# Altium PCB SLAYER_Altium.PcbDoc
Units mil, origin at the board's own origin, x right, y up, seen from the top; angles counter-clockwise.
Board outline not stored, 2 copper layers (Top Layer, Bottom Layer); 60 components, 37 nets, 254 pads, 109 vias.
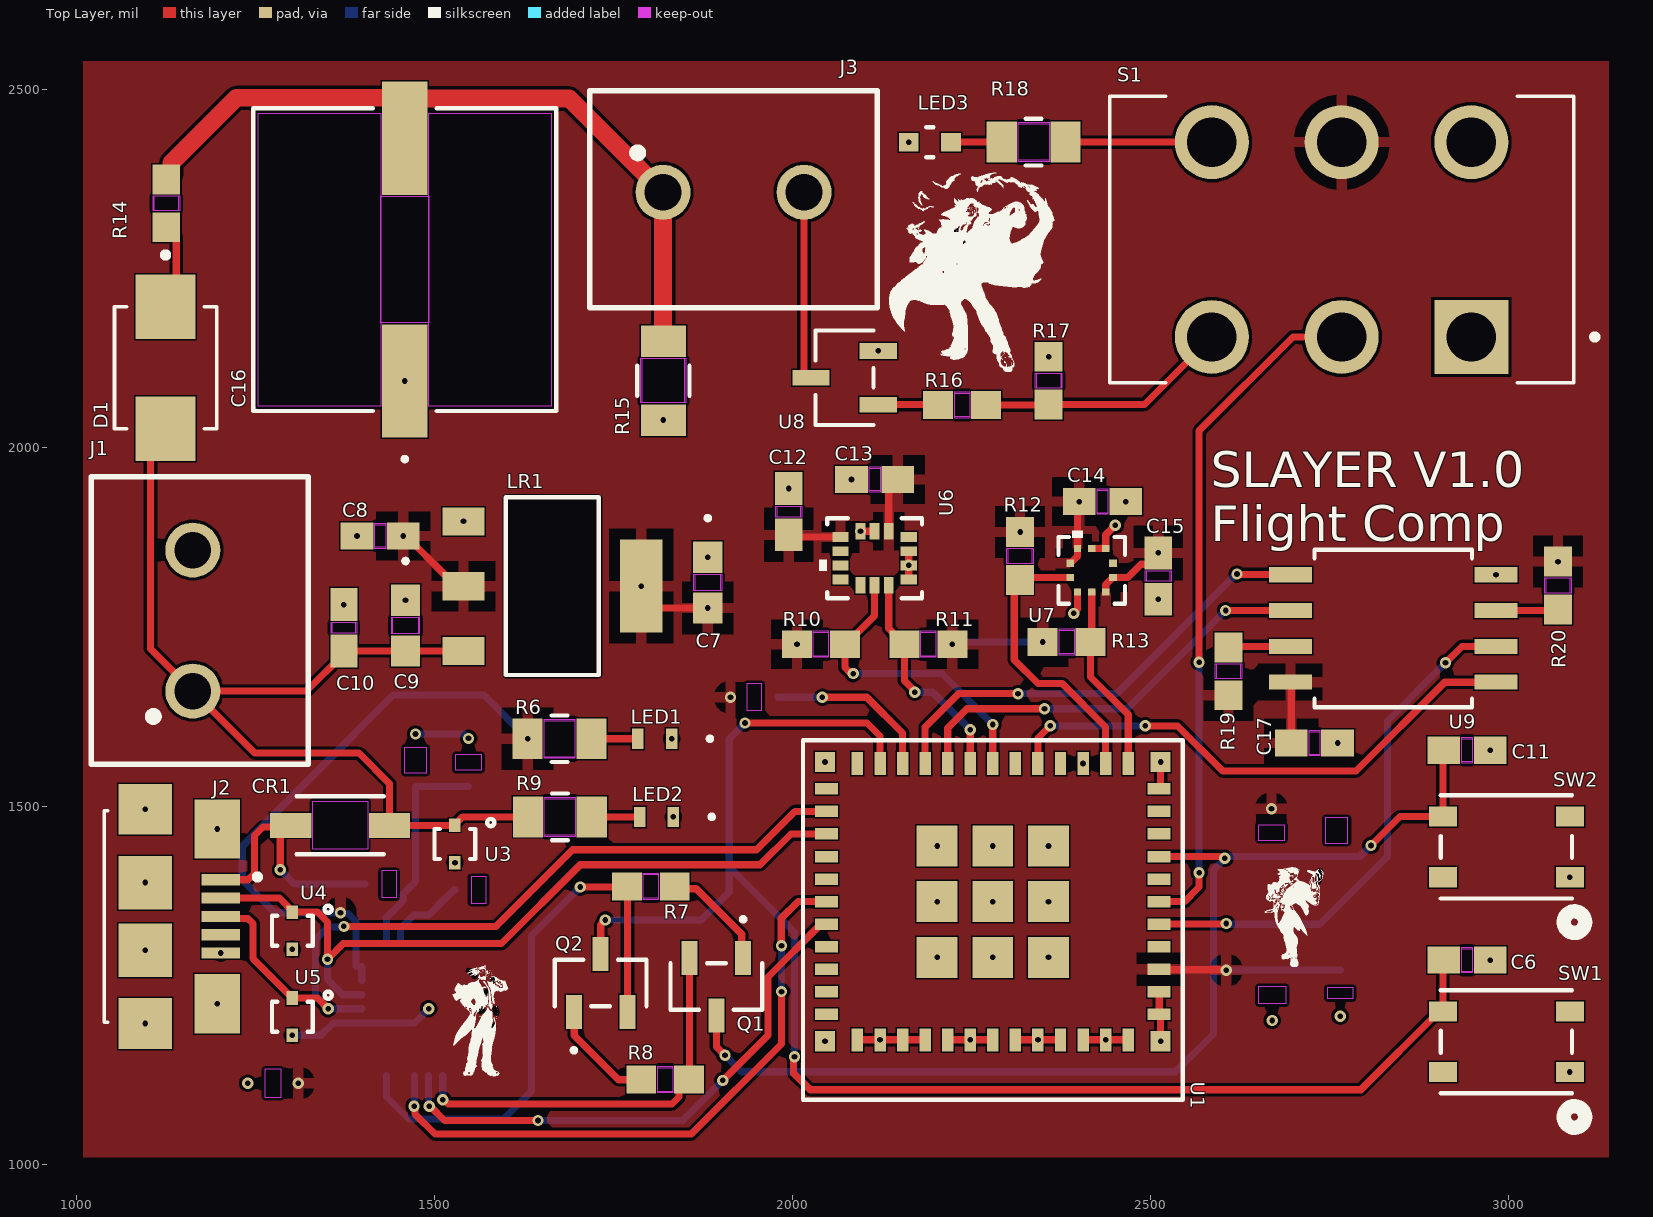
[diagram p0: Top Layer view]
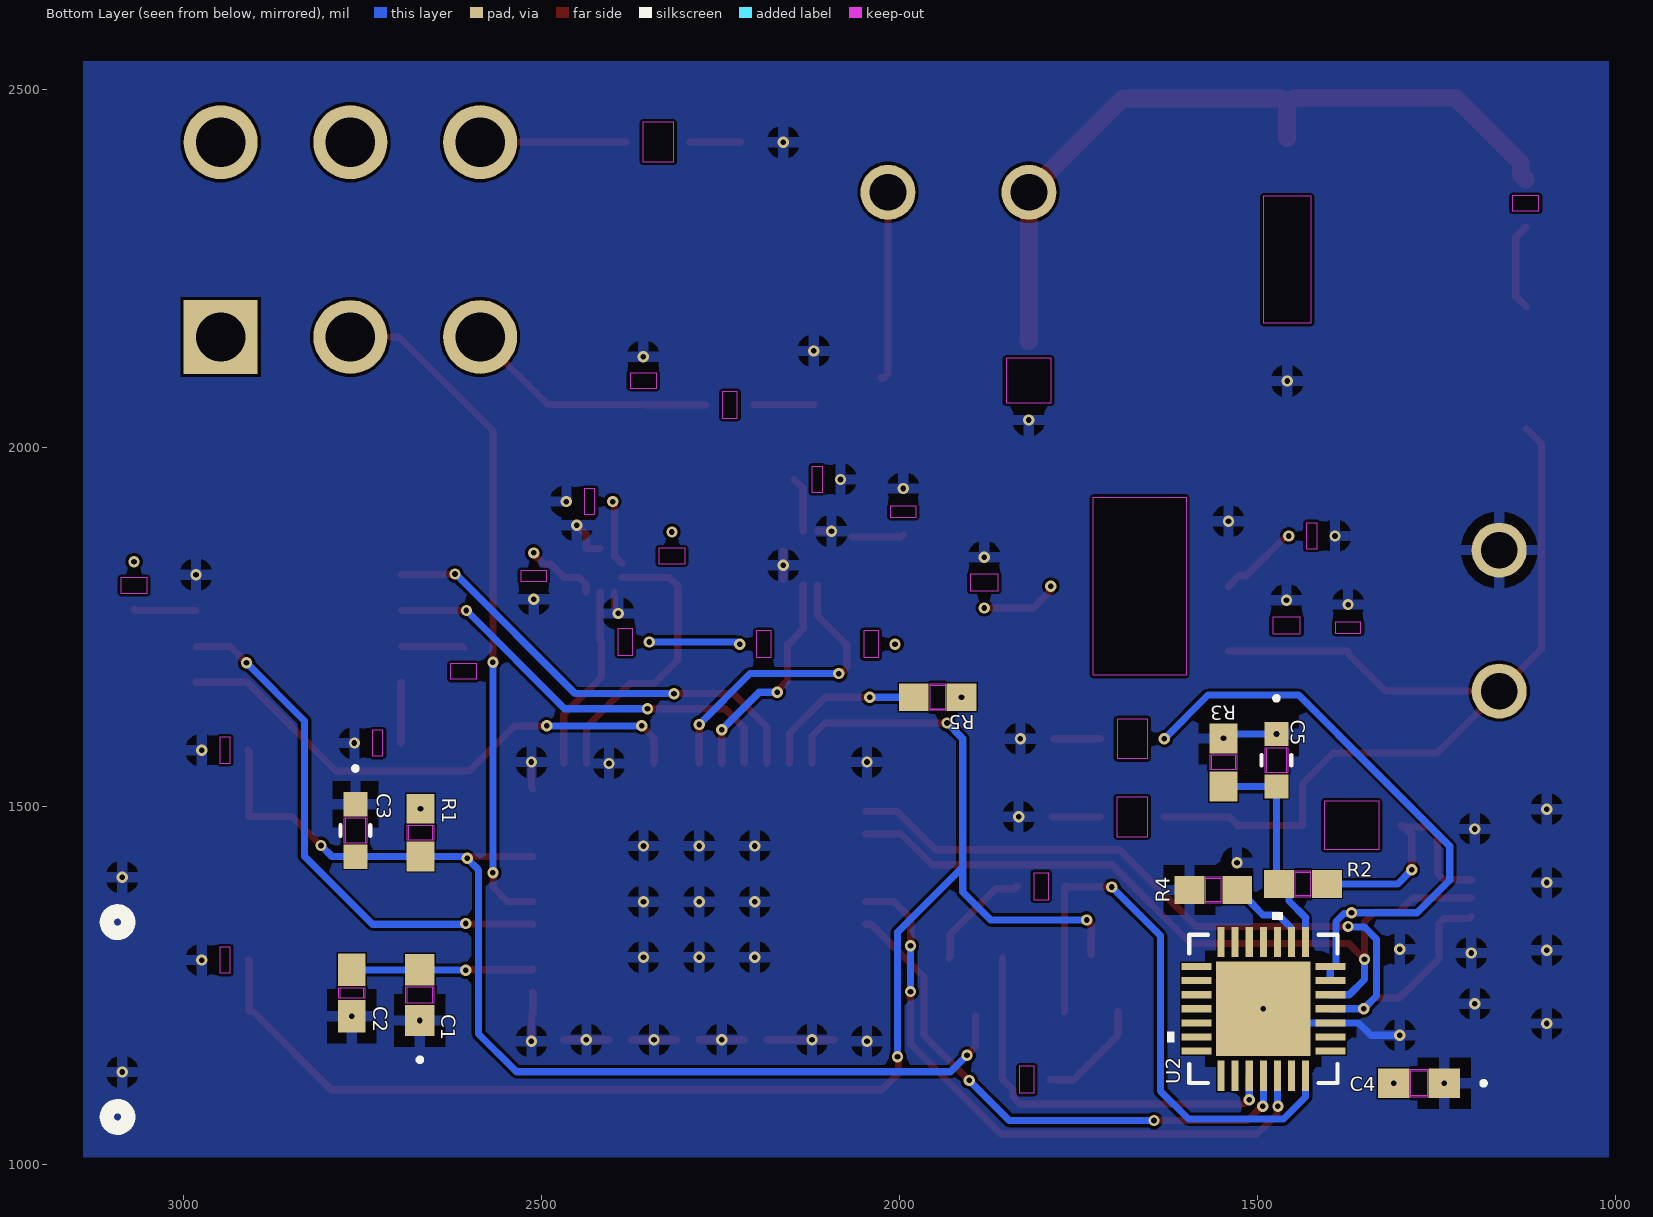
[diagram p1: Bottom Layer view, seen from below]

## Layer stack, top to bottom
Top Solder: solder mask 0.4, Solder Resist, Dk 3.5
Top Layer: signal copper 1.4
Dielectric 1: dielectric 12.6, FR-4, Dk 4.8
Bottom Layer: signal copper 1.4
Bottom Solder: solder mask 0.4, Solder Resist, Dk 3.5

## Design rules (kind name [scope] priority, off if disabled: settings)
Clearance [All] p1: gap=4 ignorepadtopadclearanceinfootprint=FALSE except(1.75: SMDPad-Fill SMDPad-Poly SMDPad-Region)
MinimumSolderMaskSliver [All] p1: minsoldermaskwidth=4
PolygonConnect [All] p1: connectstyle=Relief reliefconductorwidth=15 reliefentries=4 polygonreliefangle="90 Angle" airgapwidth=15
RoutingVias [All] p1: holewidth=28 width=50 viastyle="Through Hole" minholewidth=28 minwidth=50 maxholewidth=28 maxwidth=50
SilkToSilkClearance [All] p1: silktosilkclearance=4
SilkToSolderMaskClearance [IsPad] p1: minsilkscreentomaskgap=4 clearancetoexposedcopper=TRUE
SolderMaskExpansion [All] p1: expansion=0 istentingtop=FALSE
SupplyNets "Schematic Supply Nets_2" [InNet('3V3')] p1: voltage=0.000
SupplyNets "Schematic Supply Nets_1" [InNet('GND')] p2: voltage=0.000
SupplyNets "Schematic Supply Nets" [InNet('5V')] p3: voltage=0.000
Width [All] p1: maxlimit=30 minlimit=10 preferedwidth=10 minimp=50.000000 maximp=50.000000 favimp=50.000000
27 further rules are at their usual default settings.

## Classes and differential pairs
component class SLAYER_Storage: C17 R19 R20 U9
component class SLAYER_Sensors: C12 C13 C14 C15 R10 R11 R12 R13 U6 U7
component class SLAYER_PyroActuation: C16 D1 J3 LED3 R14 R15 R16 R17 R18 S1 U8
component class SLAYER_ESP32_M1U: C1 C2 C3 C4 C5 C6 C7 C8 C9 C10 C11 CR1 J1 J2 LED1 LED2 LR1 Q1 Q2 R1 R2 R3 R4 R5 R6 R7 R8 R9 SW2 U1 U2 U3 U4 U5

## Components (designator, comment, footprint, x,y, rotation, side; value= is the part's Value field where it differs from the comment)
C1 "10u" 10uF/25V/0603 2670,1236 r90 bottom
C2 "0.1u" 0.1uF/50V 2765,1239 r90 bottom
C3 "1u" 1uF/16V 2760,1466 r270 bottom
C4 "10u" 10uF/25V/0603 1275,1113 r0 bottom
C5 "1u" 1uF/16V 1474,1564 r270 bottom
C6 "0.1u" 0.1uF/50V 2942,1285 r180 top
C7 "10u" 10uF/25V/0603 1882,1812 r270 top
C8 "0.1u" 0.1uF/50V 1424.58,1877.14 r0 top
C9 "10u" 10uF/25V/0603 1460,1752 r270 top
C10 "0.1u" 0.1uF/50V 1374,1749 r270 top
C11 "0.1u" 0.1uF/50V 2942,1578 r180 top
C12 "CC0603KRX7R9BB104" 0.1uF/50V 1995,1911 r270 top
C13 "CC0603KRX7R9BB104" 0.1uF/50V 2115,1956 r0 top
C14 "CC0603KRX7R9BB104" 0.1uF/50V 2433.07,1925.16 r180 top
C15 "CC0603KRX7R9BB104" 0.1uF/50V 2511.07,1821.16 r90 top
C16 "1000uF" 1000uF/16V 1459,2263 r90 top
C17 "0.1u" 0.1uF/50V 2729,1588 r180 top
CR1 "B5819W-TP" "Schottky Diode" 1368.71,1473.11 r180 top
D1 "40V/2A" Schotty/40V/2A 1125,2112 r270 top
J1 "TermBlok" TerminalBlock 1163,1759 r90 top
J2 "Micro USB B" Micro_USB_B 1202,1346 r270 top
J3 "TermBlok" TerminalBlock 1918,2357 r0 top
LED1 "GrnLED" GreenLED 1808,1594 r180 top
LED2 "GrnLED" GreenLED 1810.5,1485 r180 top
LED3 "RedLED" RedLED 2192,2427 r0 top
LR1 "LinearRegulator" LinearRegulator 1665,1807 r270 top
Q1 "SS8050-G" NPN/25V/1.5A 1894,1248 r180 top
Q2 "SS8050-G" NPN/25V/1.5A 1732.5,1253 r0 top
R1 "10k" 10k/0.125W 2669,1463 r270 bottom
R2 "22.1k" 22.1k/0.125W 1437,1391 r180 bottom
R3 "47.5k" 47.5k/0.125W 1548,1561 r90 bottom
R4 "1k" 1k/0.125W 1562,1383 r0 bottom
R5 "10k" 10k/0.125W 1947,1652 r0 bottom
R6 "5.1k" 5.1k/0.25W 1675,1594 r0 top
R7 "10k" 10k/0.125W 1802.5,1388 r180 top
R8 "10k" 10k/0.125W 1822.5,1118 r0 top
R9 "5.1k" 5.1k/0.25W 1675.5,1485 r0 top
R10 "4.7k" 4.7k/0.125W 2040,1726 r0 top
R11 "4.7k" 4.7k/0.125W 2190,1726 r180 top
R12 "4.7k" 4.7k/0.125W 2318.07,1849.16 r270 top
R13 "4.7k" 4.7k/0.125W 2383.07,1729.16 r0 top
R14 "1k" 1k/0.125W 1126,2341.51 r90 top
R15 "500k" 500k/0.25W 1820,2094 r270 top
R16 "1k" 1k/0.125W 2237,2060 r0 top
R17 "10k" 10k/0.125W 2358,2094 r90 top
R18 "5.1k" 5.1k/0.25W 2337,2427 r180 top
R19 "10k" 10k/0.125W 2609,1688 r90 top
R20 "10k" 10k/0.125W 3069,1808 r270 top
S1 "DPDT" SlideSwitch2 2767,2291 r180 top
SW1 "TactSwitch" TactSwitch 2997,1171 r180 top
SW2 "TactSwitch" TactSwitch 2997,1443 r180 top
U1 "ESP32-C3-MINI-1U-N4" ESP32-C3-MINI-1U_EXP 2280,1341 r180 top
U2 "CP2102N-A02-GQFN28" "USB to UART" 1492.32,1217 r0 bottom
U3 "ESD5B5.0ST1G" "TVS Diode" 1529,1447 r180 top
U4 "ESD5B5.0ST1G" "TVS Diode" 1302,1326 r180 top
U5 "ESD5B5.0ST1G" "TVS Diode" 1302,1206 r180 top
U6 "IMU" IMU 2115,1846 r180 top
U7 "BMP581" BMP581 2418.07,1829.16 r0 top
U8 "MOSFET" MOSFET 2073,2098 r90 top
U9 "SPI_Mem" SPI_Memory/1Mb 2839,1748 r180 top

## Footprints (in the part's own frame and the unit in brackets; to place one, negate y for a bottom-side part, rotate by r counter-clockwise, add the part's x,y. Pads: shape width x height; smd on the part's side, far side on the other; paste and mask are expansions set on the pad)
0.1uF/50V [mil] "CC0603KRX7R9BB104"
  rect 45.65x37.97 smd paste+0 mask+0: 1(-32.33,0) 2(32.33,0)
  Top Layer keep-out region: -7.5,-16 -7.5,16 7.5,16 7.5,-16
  Keep-Out Layer region: -7.5,-18 -7.5,18 7.5,18 7.5,-18
  body extent -34,-18 34,18, height 36
1k/0.125W [mil] "CRCW06031K00FKEA"
  rect 41.65x38.97 smd paste+0 mask+0: 1(-33.33,0) 2(33.33,0)
  Top Layer keep-out region: -10.5,-16.5 -10.5,16.5 10.5,16.5 10.5,-16.5
  Keep-Out Layer region: -10.5,-18.5 -10.5,18.5 10.5,18.5 10.5,-18.5
  body extent -33,-19 33,19, height 20
1uF/16V [mil] "CL10B105KO8NNNC"
  rect 33.81x33.5 smd paste+0 mask+0: 1(-36.59,0) 2(36.59,0)
  Top Layer keep-out region: -17.68,-13.75 -17.68,13.75 17.68,13.75 17.68,-13.75
  Keep-Out Layer region: -17.68,-15.75 -17.68,15.75 17.68,15.75 17.68,-15.75
  silkscreen extent -89,-21 7,21, body extent -31,-16 31,16, height 35
4.7k/0.125W [mil] "CRCW06034K70FKEA"
  rect 42x39 smd paste+0 mask+0: 1(-33.5,0) 2(33.5,0)
  Top Layer keep-out region: -10.5,-16.5 -10.5,16.5 10.5,16.5 10.5,-16.5
  Keep-Out Layer region: -10.5,-18.5 -10.5,18.5 10.5,18.5 10.5,-18.5
  body extent -33,-19 33,19, height 20
5.1k/0.25W [mil] "CRCW08055K10FKEA"
  rect 42x57 smd paste+0 mask+0: 1(-44.5,0) 2(44.5,0)
  Top Layer keep-out region: -21.5,-25.5 -21.5,25.5 21.5,25.5 21.5,-25.5
  Keep-Out Layer region: -21.5,-27.5 -21.5,27.5 21.5,27.5 21.5,-27.5
  silkscreen extent -11,-32 11,32, body extent -44,-27 44,27, height 20
10k/0.125W [mil] "CRCW060310K0FKEA"
  rect 41.65x38.97 smd paste+0 mask+0: 1(-33.33,0) 2(33.33,0)
  Top Layer keep-out region: -10.5,-16.5 -10.5,16.5 10.5,16.5 10.5,-16.5
  Keep-Out Layer region: -10.5,-18.5 -10.5,18.5 10.5,18.5 10.5,-18.5
  body extent -33,-19 33,19, height 20
10uF/25V/0603 [mil] "GRM188R61E106KA73D"
  rect 43.65x40.97 smd paste+0 mask+0: 1(-35.33,0) 2(35.33,0)
  Top Layer keep-out region: -11.5,-17.5 -11.5,17.5 11.5,17.5 11.5,-17.5
  Keep-Out Layer region: -11.5,-19.5 -11.5,19.5 11.5,19.5 11.5,-19.5
  silkscreen extent -93,-3 -87,3, body extent 0,0 10,10, height 10
22.1k/0.125W [mil] "CRCW060322K1FKEA"
  rect 42x39 smd paste+0 mask+0: 1(-33.5,0) 2(33.5,0)
  Top Layer keep-out region: -10.5,-16.5 -10.5,16.5 10.5,16.5 10.5,-16.5
  Keep-Out Layer region: -10.5,-18.5 -10.5,18.5 10.5,18.5 10.5,-18.5
  body extent -33,-19 33,19, height 20
47.5k/0.125W [mil] "CRCW060347K5FKEA"
  rect 42x39 smd paste+0 mask+0: 1(-33.5,0) 2(33.5,0)
  Top Layer keep-out region: -10.5,-16.5 -10.5,16.5 10.5,16.5 10.5,-16.5
  Keep-Out Layer region: -10.5,-18.5 -10.5,18.5 10.5,18.5 10.5,-18.5
  body extent -33,-19 33,19, height 20
500k/0.25W [mil] "RC1206FR-07470KL"
  rect 44x63 smd paste+0 mask+0: 1(-55,0) 2(55,0)
  Top Layer keep-out region: -31,-29.5 -31,29.5 31,29.5 31,-29.5
  Keep-Out Layer region: -31,-31.5 -31,31.5 31,31.5 31,-31.5
  silkscreen extent -21,-37 21,37, body extent -63,-31 63,31, height 28
1000uF/16V [mil] "A768MS108M1CLAS015"
  rect 158x63 smd paste+0 mask+0: 1(-169.5,0) 2(169.5,0)
  Top Layer keep-out region: -204.5,33.5 -204.5,204.5 204.5,204.5 204.5,33.5
  Top Layer keep-out region: -88.5,-33.5 -88.5,33.5 88.5,33.5 88.5,-33.5
  Top Layer keep-out region: -204.5,-204.5 -204.5,-33.5 204.5,-33.5 204.5,-204.5
  Keep-Out Layer region: -88.5,-33.5 -88.5,33.5 88.5,33.5 88.5,-33.5
  silkscreen extent -281,-212 212,212, body extent -221,-206 221,206, height 502
BMP581 [mil]
  rect 11x10 smd paste+0 mask+0: 1(-29.93,9.84) 2(-29.93,-9.84) 6(29.93,-9.84) 7(29.93,9.84)
  rect 10x10 smd paste+0 mask+0: 3(-19.68,-30.43) 4(0,-30.43) 5(19.69,-30.43) 8(19.69,30.43) 9(0,30.43) 10(-19.68,30.43)
  silkscreen extent -46,-46 46,55, body extent -41,-41 41,41, height 32
ESP32-C3-MINI-1U_EXP [mil]
  rect 32x16 smd paste+0 mask+0: 1(-232.28,131.89) 2(-232.28,100.39) 3(-232.28,68.9) 4(-232.28,37.4) 5(-232.28,5.91) 6(-232.28,-25.59) 7(-232.28,-57.09) 8(-232.28,-88.58) 9(-232.28,-120.08) 10(-232.28,-151.57) 11(-232.28,-183.07) 25(232.28,-183.07) 26(232.28,-151.57) 27(232.28,-120.08) 28(232.28,-88.58) 29(232.28,-57.09) 30(232.28,-25.59) 31(232.28,5.91) 32(232.28,37.4) 33(232.28,68.9) 34(232.28,100.39) 35(232.28,131.89)
  rect 16x32 smd paste+0 mask+0: 12(-188.98,-218.5) 13(-157.48,-218.5) 14(-125.98,-218.5) 15(-94.49,-218.5) 16(-62.99,-218.5) 17(-31.5,-218.5) 18(0,-218.5) 19(31.5,-218.5) 20(62.99,-218.5) 21(94.49,-218.5) 22(125.98,-218.5) 23(157.48,-218.5) 24(188.98,-218.5) 36(188.98,167.32) 37(157.48,167.32) 38(125.98,167.32) 39(94.49,167.32) 40(62.99,167.32) 41(31.5,167.32) 42(0,167.32) 43(-31.5,167.32) 44(-62.99,167.32) 45(-94.49,167.32) 46(-125.98,167.32) 47(-157.48,167.32) 48(-188.98,167.32)
  rect 57x57 smd paste+0 mask+0: 49(0,-25.59) 54(-77.76,52.17) 55(-77.76,-25.59) 56(-77.76,-103.35) 57(0,-103.35) 58(77.76,-103.35) 59(77.76,-25.59) 60(77.76,52.17) 61(0,52.17)
  rect 28x28 smd paste+0 mask+0: 50(234.25,169.29) 51(234.25,-220.47) 52(-234.25,-220.47) 53(-234.25,169.29)
  silkscreen extent -265,-251 265,251
GreenLED [mil] "LTST-C190KGKT"
  rect 16x28 smd paste+0 mask+0: 1(-23.5,0) 2(23.5,0)
  silkscreen extent -80,-3 -74,3, body extent -31,-16 31,16, height 32
IMU [mm] "LSM6DSMTR"
  rect 0.577x0.352 smd paste+0 mask+0.102: 1(-1.21,0.75) 2(-1.21,0.25) 3(-1.21,-0.25) 4(-1.21,-0.75) 8(1.21,-0.75) 9(1.21,-0.25) 10(1.21,0.25) 11(1.21,0.75)
  rect 0.352x0.577 smd paste+0 mask+0.102: 5(-0.5,-0.956) 6(0,-0.956) 7(0.5,-0.956) 12(0.5,0.956) 13(0,0.956) 14(-0.5,0.956)
  silkscreen extent -1.68,-1.42 1.96,1.42, body extent -1.55,-1.3 1.55,1.3, height 0.87
LinearRegulator [mm] "SGM2212-3.3XKC3G/TR"
  rect 1x1.5 smd paste+0 mask+0: 1(-2.3,-3.15) 2(0,-3.15) 3(2.3,-3.15)
  rect 3.3x1.5 smd paste+0 mask+0: 4(0,3.15)
  Keep-Out Layer region: -3.15,-1.646 3.15,-1.646 3.15,1.654 -3.15,1.654
  silkscreen extent -3.15,-1.65 3.15,1.65
Micro_USB_B [mm] "10118192-0002LF"
  rect 0.4x1.35 smd: 1(-1.3,0) 2(-0.65,0) 3(0,0) 4(0.65,0) 5(1.3,0)
  rect 2.1x1.6 smd: S1(-3.1,-0.125) S2(3.1,-0.125)
  rect 1.8x1.9 smd: S3(-3.8,-2.675) S6(3.8,-2.675)
  rect 1.9x1.9 smd: S4(-1.2,-2.675) S5(1.2,-2.675)
  silkscreen extent -3.75,-4.13 3.75,1.4, body extent -3.95,-4.82 3.95,0.28, height 2.7
MOSFET [mil] "AO3400A"
  rect 22x52 smd paste+0 mask+0: 1(-37.5,-47) 2(37.5,-47) 3(0,47)
  silkscreen extent -66,-41 66,41, body extent -61,-59 61,59, height 49
NPN/25V/1.5A [mm] "SS8050-G"
  rect 0.568x1.208 smd paste+0 mask+0: 1(-0.95,-1.021) 2(0.95,-1.021) 3(0,1.021)
  silkscreen extent -1.63,-2.46 1.63,0.83, body extent -1.5,-1.28 1.5,1.28, height 1.04
RedLED [mil] "LTST-C190KRKT"
  rect 27.81x26.03 smd paste+0 mask+0: 1(-29.41,0) 2(29.41,0)
  silkscreen extent -5,-21 5,21, body extent -31,-16 31,16, height 32
"Schottky Diode" [mil] "B5819W-TP"
  rect 57.37x34.94 smd paste+0 mask+0: 1(-68.97,0) 2(68.97,0)
  Keep-Out Layer region: -38.28,-33.5 -38.28,33.5 38.28,33.5 38.28,-33.5
  silkscreen extent -61,-41 61,41, body extent -76,-36 76,36, height 59
Schotty/40V/2A [mm] "SS24"
  rect 2.28x2.12 smd: A(2.165,0) C(-2.165,0)
  silkscreen extent -4.1,-1.81 2.16,1.81, body extent -2.68,-1.81 2.68,1.81, height 2.65
SlideSwitch2 [mm] "SW_GF-126-0159"
  rect 2.625x2.625 / inner round 2.625 / far side rect 2.625x2.625 hole 1.75: 1(-4.6,3.455)
  round 2.625 hole 1.75: 2(0,3.455) 3(4.6,3.455) 4(-4.6,-3.455) 5(0,-3.455) 6(4.6,-3.455)
  silkscreen extent -9.08,-5.08 8.23,5.08
SPI_Memory/1Mb [mil] "W25Q128JVSIQ"
  rect 59.56x20.97 smd paste+0 mask+0: 1(-143.5,75) 2(-143.5,25) 3(-143.5,-25) 4(-143.5,-75) 5(143.5,-75) 6(143.5,-25) 7(143.5,25) 8(143.5,75)
  silkscreen extent -110,-110 110,110, body extent -159,-105 159,105, height 85
TactSwitch [mil] "PTS815 SJM 250 SMTR LFS"
  rect 39x28 smd paste+0 mask+0: 1(-88.58,42.32) 2(88.58,42.32) 3(-88.58,-42.32) 4(88.58,-42.32)
  silkscreen extent -110,-72 92,120
TerminalBlock [mm] "691137710002"
  round 1.95 hole 1.3: 1(-2.5,0) 2(2.5,0)
  silkscreen extent -5.1,-4.1 5.1,3.6
"TVS Diode" [mil] "ESD5B5.0ST1G"
  rect 16x19 smd paste+0 mask+0: 1(0,-26) 2(0,26)
  silkscreen extent -55,-35 29,21
"USB to UART" [mil] "CP2102N-A02-GQFN28"
  rect 42x10 smd paste+0 mask+0: 1(-93.5,59.06) 2(-93.5,39.37) 3(-93.5,19.68) 4(-93.5,0) 5(-93.5,-19.68) 6(-93.5,-39.37) 7(-93.5,-59.06) 15(93.5,-59.06) 16(93.5,-39.37) 17(93.5,-19.68) 18(93.5,0) 19(93.5,19.68) 20(93.5,39.37) 21(93.5,59.06)
  rect 10x42 smd paste+0 mask+0: 8(-59.06,-93.5) 9(-39.37,-93.5) 10(-19.69,-93.5) 11(0,-93.5) 12(19.68,-93.5) 13(39.37,-93.5) 14(59.06,-93.5) 22(59.06,93.5) 23(39.37,93.5) 24(19.68,93.5) 25(0,93.5) 26(-19.69,93.5) 27(-39.37,93.5) 28(-59.06,93.5)
  rect 132x132 smd paste-66 mask+0: 29(0,0)
  silkscreen extent -104,-134 134,104, body extent -99,-99 99,99, height 32

## Part data
C1 C4 C7 C9: library part 10uF/25V, "GRM188R61E106KA73D", Manufacturer_Name=Murata, Copyright="Copyright (C) 2026 Ultra Librarian. All rights reserved.", Manufacturer_Part_Number=GRM188R61E106KA73D
C2 C6 C8 C10 C11 C17: library part 0.1uF/50V, "CC0603KRX7R9BB104", Manufacturer_Name=Yageo, Copyright="Copyright (C) 2025 Ultra Librarian. All rights reserved.", Manufacturer_Part_Number=CC0603KRX7R9BB104
C3 C5: library part 1uF/16V, "CL10B105KO8NNNC", Manufacturer_Name=Samsung, Copyright="Copyright (C) 2025 Ultra Librarian. All rights reserved.", Manufacturer_Part_Number=CL10B105KO8NNNC
C12 C13 C14 C15: library part 0.1uF/50V, Manufacturer_Name=Yageo, Copyright="Copyright (C) 2025 Ultra Librarian. All rights reserved.", Manufacturer_Part_Number=CC0603KRX7R9BB104
C16: library part 1000uF/16V, "A768MS108M1CLAS015", Manufacturer_Name=Kemet, Copyright="Copyright (C) 2025 Ultra Librarian. All rights reserved.", Manufacturer_Part_Number=A768MS108M1CLAS015, Type="Aluminum-Polymer Capacitors"
CR1: library part "Schottky Diode", Manufacturer_Name=MCC, Copyright="Copyright (C) 2025 Ultra Librarian. All rights reserved.", Manufacturer_Part_Number=B5819W-TP
D1: library part Schottky/40V/2A, "SS24", Package="SMB-2 Taiwan Semiconductor", Availability="In Stock", Check_prices=https://www.snapeda.com/parts/SS24/Taiwan+Semiconductor/view-part/?ref=eda, MF="Taiwan Semiconductor", MP=SS24, Price=None, SnapEDA_Link=https://www.snapeda.com/parts/SS24/Taiwan+Semiconductor/view-part/?ref=snap
J1 J3: library part 2TerminalBlock, "691137710002", Package=None, Check_prices=https://www.snapeda.com/parts/691137710002/W%25C3%25BCrth+Elektronik+Midcom/view-part/?ref=eda, MF="WÃ¼rth Elektronik", MP=691137710002, SnapEDA_Link=https://www.snapeda.com/parts/691137710002/W%25C3%25BCrth+Elektronik+Midcom/view-part/?ref=snap
J2: "10118192-0002LF", Package=None, Check_prices=https://www.snapeda.com/parts/10118192-0002LF/Amphenol+FCI/view-part/?ref=eda, MF="Amphenol ICC", MP=10118192-0002LF, SnapEDA_Link=https://www.snapeda.com/parts/10118192-0002LF/Amphenol+FCI/view-part/?ref=snap
LED1 LED2: library part GreenLED, "LTST-C190KGKT", Manufacturer_Name=LITE-ON, Copyright="Copyright (C) 2025 Ultra Librarian. All rights reserved.", Manufacturer_Part_Number=LTST-C190KGKT
LED3: "LTST-C190KRKT", Manufacturer_Name=LITE-ON, Copyright="Copyright (C) 2026 Ultra Librarian. All rights reserved.", Manufacturer_Part_Number=LTST-C190KRKT, Type="LED Indication"
LR1: "SGM2212-3.3XKC3G/TR"
Q1 Q2: library part NPN/25V/1.5A, Manufacturer_Name=Comchip, Copyright="Copyright (C) 2026 Ultra Librarian. All rights reserved.", Manufacturer_Part_Number=SS8050-G, RefDes=RefDes, Type=Type
R1 R5 R7 R8 R17 R19 R20: library part 10k/0.125W, "CRCW060310K0FKEA", Manufacturer_Name=Vishay, Copyright="Copyright (C) 2025 Ultra Librarian. All rights reserved.", Manufacturer_Part_Number=CRCW060310K0FKEA
R2: library part 22.1k/0.125W, "CRCW060322K1FKEA", Manufacturer_Name=Vishay, Copyright="Copyright (C) 2025 Ultra Librarian. All rights reserved.", Manufacturer_Part_Number=CRCW060322K1FKEA
R3: library part 47.5k/0.125W, "CRCW060347K5FKEA", Manufacturer_Name=Vishay, Copyright="Copyright (C) 2026 Ultra Librarian. All rights reserved.", Manufacturer_Part_Number=CRCW060347K5FKEA
R4 R14 R16: library part 1k/0.125W, "CRCW06031K00FKEA", Manufacturer_Name=Vishay, Copyright="Copyright (C) 2026 Ultra Librarian. All rights reserved.", Manufacturer_Part_Number=CRCW06031K00FKEA
R6 R9 R18: library part 5.1k/0.25W, "CRCW08055K10FKEA", Manufacturer_Name=Vishay, Copyright="Copyright (C) 2026 Ultra Librarian. All rights reserved.", Manufacturer_Part_Number=CRCW08055K10FKEA
R10 R11 R12 R13: library part 4.7k/0.125W, "CRCW06034K70FKEA", Manufacturer_Name=Vishay, Copyright="Copyright (C) 2025 Ultra Librarian. All rights reserved.", Manufacturer_Part_Number=CRCW06034K70FKEA
R15: library part 500k/0.25W, "RC1206FR-07470KL", Manufacturer_Name=Yageo, Copyright="Copyright (C) 2026 Ultra Librarian. All rights reserved.", Manufacturer_Part_Number=RC1206FR-07470KL
S1: library part SlideSwitch, "GF-126-0159", Package=None, Availability=Unavailable, MF="{'manufacturer': u'CW Industries'}", MP=GF-126-0159, Price=None
SW1 SW2: "PTS815 SJM 250 SMTR LFS", Manufacturer_Name="C&K Components", Copyright="Copyright (C) 2026 Ultra Librarian. All rights reserved.", Manufacturer_Part_Number="PTS815 SJM 250 SMTR LFS", RefDes=RefDes, Type=Type
U1: "Description", Manufacturer_Name="Espressif Systems", Copyright="Copyright (C) 2025 Ultra Librarian. All rights reserved.", Manufacturer_Part_Number=ESP32-C3-MINI-1U-N4, RefDes=RefDes, Type=RF
U2: library part "USB to UART", Manufacturer_Name="Silicon Labs", Copyright="Copyright (C) 2025 Ultra Librarian. All rights reserved.", Manufacturer_Part_Number=CP2102N-A02-GQFN28, RefDes=RefDes, Type=Type
U3 U4 U5: library part "TVS Diode", Manufacturer_Name=onsemi, Copyright="Copyright (C) 2025 Ultra Librarian. All rights reserved.", Manufacturer_Part_Number=ESD5B5.0ST1G, RefDes=RefDes, Type=Type
U6: "LSM6DSMTR", Manufacturer_Name=STMicroelectronics, Copyright="Copyright (C) 2026 Ultra Librarian. All rights reserved.", Manufacturer_Part_Number=LSM6DSMTR, RefDes=RefDes, Type=Type
U7: Manufacturer_Name="Bosch Sensortec", Copyright="Copyright (C) 2026 Ultra Librarian. All rights reserved.", Manufacturer_Part_Number=BMP581, RefDes=RefDes, Type=Type
U8: library part AO3400A, "AO3400A", Manufacturer_Name="Alpha and Omega Semiconductor", Copyright="Copyright (C) 2025 Ultra Librarian. All rights reserved.", Manufacturer_Part_Number=AO3400A, RefDes=RefDes, Type=Type
U9: library part SPI_Memory/1Mb, "W25Q128JVSIQ", Manufacturer_Name=Winbond, Copyright="Copyright (C) 2026 Ultra Librarian. All rights reserved.", Manufacturer_Part_Number=W25Q128JVSIQ, RefDes=RefDes, Type=Type

## Via types
v1: diameter 15.75, hole 7.87, Top Layer to Bottom Layer, 109 vias

## Nets (pads, with @x,y where several pads share a name; then routed paths per layer and width w, separated by ;. In a path a pad name is that pad's centre, name@x,y a point inside that pad or via, vN(x,y) a via of type N, cw(c..) or ccw(c..) an arc to the next point about the centre after c; other vN are vias at no path point)
3V3: C1.2 C2.2 C4.2 C7.2 C8.2 C12.2 C13.2 C14.2 C15.2 C17.2 LR1.2 LR1.4 R1.1 R5.1 R6.1 R10.1 R11.1 R12.1 R13.1 R19.1 R20.1 S1.5 U1.3 U2.6 U2.7 U6.5 U6.8 U7.1 U7.5 U7.6 U7.10 U9.8 | length 1866.2
  Top Layer w10: v1(1456.91,1877.14) 1460.75,1877.14 1516.2,1821.69 1526.3,1821.69 LR1.2 ; v1(1789.02,1807) 1789.02,1801.2 1813.54,1776.67 v1(1882,1776.67) ; C12.2 1998.15,1875.53 U6.8 ; U6.5 2134.68,1943.36 C13.2 ; U7.1 2388.63,1839 2398.38,1848.75 U7.10 2398.38,1922.8 v1(2400.74,1925.16) ; U7.5 2437.75,1809.57 2447.5,1819.32 U7.6 2468.5,1819.32 2486.84,1837.66 2497.08,1837.66 2511.07,1851.64 v1(2511.07,1853.48) ; U1.3 2512.83,1271.55 2605.45,1271.55 v1(2606,1271) ; U9.8 2696.67,1671.83 C17.2
  Bottom Layer w10: v1@1369.21,1348.87 1370.39,1350.06 1379.8,1350.06 1390.87,1338.99 1390.87,1276.06 U2.7 U2.6 ; v1(1369.21,1351.16) 1277.84,1351.16 1232,1397 1232,1444 1334,1546 1443,1655 1569.5,1655 v1(1630.5,1594) ; v1(2223.5,1726) 2225.06,1726 2228.21,1729.16 v1(2349.57,1729.16) ; v1(2606,1271) 2669.67,1271 C1.2 C2.2
  other v1: 1310.33,1113 2669,1496.33 1913.67,1652 2006.5,1726 3069,1841.33 2318.07,1882.66
5V: C9.2 C10.2 CR1.1 D1.A J1.1 LR1.3 R9.1 U3.1 | length 1388.5
  Top Layer w10: D1.A 1104,2005.76 1104,1719.57 J1.1 ; LR1.3 1540.76,1716.67 C9.2 C10.2 1374,1712.83 1321.74,1660.57 J1.1 ; R9.1 1539.5,1485 1529,1474.5 U3.1 1437.78,1473 1437.78,1531.22 1395,1574 1249.57,1574 J1.1
CHIP_PU: C3.2 C11.2 Q1.3 R1.2 SW2.4 U1.8 | length 1540.7
  Top Layer w10: Q1.3 1894,1164 v1(1906,1152) ; U1.8 2599.86,1429.58 2602.44,1427 v1(2604,1427) ; v1(2808,1445) 2848.32,1485.32 SW2.4 2908.42,1576.74 C11.2
  Bottom Layer w10: v1(1906,1152) 1929,1129 2535,1129 2588,1182 2588,1411 v1(2604,1427) 2605.56,1427 2608.14,1429.58 2668.91,1429.58 R1.2 2669.26,1429.41 C3.2 2792.41,1429.41 v1(2808,1445)
DTR: Q2.2 R7.2 U2.28 | length 815.6
  Top Layer w10: v1(1704,1387) 1768.17,1387 R7.2 1769.9,1387.27 Q2.2
  Bottom Layer w10: U2.28 1433.26,1093.74 1464,1063 1597,1063 1636,1102 1636,1319 v1(1704,1387)
DTR_NPN: Q1.2 R8.2 U2.24 | length 570.4
  Top Layer w10: v1(1512,1090) 1513.56,1090 1519.56,1084 1832,1084 1842,1094 1842,1104.17 1856.6,1118.77 Q1.2
  Bottom Layer w10: v1(1512,1090) U2.24
GND: C1.1 C2.1 C3.1 C4.1 C5.1 C6.1 C7.1 C8.1 C9.1 C10.1 C11.1 C12.1 C13.1 C14.1 C15.1 C16.1 C17.1 J1.2 J2.5 J2.S1 J2.S2 J2.S3 J2.S4 J2.S5 J2.S6 LED1.1 LED2.1 LED3.1 LR1.1 R3.2 R4.2 R15.2 R17.2 SW1.1 SW2.1 U1.1 U1.2 U1.11 U1.14 U1.36 U1.37 U1.38 U1.39 U1.40 U1.41 U1.42 U1.43 U1.44 U1.45 U1.46 U1.47 U1.48 U1.49 U1.50 U1.51 U1.52 U1.53 U1.54 U1.55 U1.56 U1.57 U1.58 U1.59 U1.60 U1.61 U2.3 U2.29 U3.2 U4.2 U5.2 U6.1 U6.2 U6.3 U6.6 U6.7 U7.3 U7.8 U7.9 U8.2 U9.4 | length 822.1
  Top Layer w10: U1.36 v1(2122.52,1173.68) U1.38 U1.39 ; v1(2095.32,1883.65) U6.6 ; U6.1 v1(2162.65,1836.16) U6.3 ; U1.40 v1(2248.5,1173.68) U1.42 ; U1.43 v1(2342.99,1173.68) U1.45 ; v1(2393,1769) 2398.38,1774.38 U7.3 ; U1.46 v1(2437.48,1173.68) U1.48 ; U7.9 U7.8 2437.75,1878.75 v1(2451,1892) ; U1.2 U1.1 2514.25,1207.14 v1(2514.25,1171.71) ; U1.11 2514.25,1526.04 v1(2514.25,1561.47)
  Bottom Layer w10: v1(1302,1180) 1342,1180 1359.32,1197.32 U2.3 1472.63,1197.32 v1(1492.32,1217) ; v1(1474,1600.59) 1541.91,1600.59 v1(1548,1594.5)
  other v1: 1239.67,1113 3085.58,1128.68 2045.75,1171.71 1096.68,1196.39 2670,1200.67 2765,1206.67 1197.08,1223.95 2974.33,1285 2202.24,1288.83 2280,1288.83 2357.76,1288.83 1202,1294.82 1096.68,1298.76 1302,1300 2202.24,1366.59 2280,1366.59 2357.76,1366.59 1096.68,1393.24 3085.58,1400.68 1529,1421 2202.24,1444.35 2280,1444.35 2357.76,1444.35 1197.08,1468.05 1834,1485 1096.68,1495.61 2405.98,1559.5 2045.75,1561.47 2974.33,1578 2761.33,1588 1831.5,1594 1374,1781.33 1460,1787.33 2511.07,1788.83 2982.5,1823 1882,1847.33 1392.25,1877.14 1540.98,1897.55 2465.39,1925.16 1995,1943.33 2082.67,1956 1820,2039 1459,2093.5 2358,2127.33 2120,2135.5 2162.59,2427
GPIO8: R5.2 U1.22 | length 236.9
  Top Layer w10: v1(2042,1652.02) 2103.98,1652.02 2154.02,1601.98 U1.22
  Bottom Layer w10: R5.2 v1(2042,1652.02)
GPIO9: C6.2 Q2.3 SW1.4 U1.23 | length 2078.3
  Top Layer w10: Q2.3 1732.5,1334.5 v1(1739,1341) ; v1(1934,1616) 2104.44,1616 2122.52,1597.92 U1.23 ; v1(2003,1150) 2001.9,1148.9 2001.9,1127.1 2025,1104 2793.59,1104 2902.92,1213.32 SW1.4 C6.2@2908.42,1285
  Bottom Layer w10: v1(1739,1341) 1873,1341 1912,1380 1912,1415 ; v1(1934,1616) 1912,1594 1912,1415 ; v1(2003,1150) 2003,1324 1912,1415
GPIO18: J2.3 U1.26 U2.4 U5.1 | length 1171.9
  Top Layer w10: J2.3 1204.87,1343.13 1239.87,1343.13 1247,1336 1247,1287 1297.5,1236.5 1299,1236.5 1302,1233.5 U5.1 1337,1232 v1(1352,1217) ; v1(1374,1332) 1586,1332 1693,1439 1950,1439 2003.57,1492.57 U1.26
  Bottom Layer w10: v1(1374,1332) 1373.13,1331.13 1351.13,1331.13 1334.13,1314.13 1334.13,1234.87 v1(1352,1217) U2.4
GPIO19: J2.2 U1.27 U2.5 U4.1 | length 1069.7
  Top Layer w10: J2.2 1283.91,1371.59 1302,1353.5 U4.1 1337,1352 1351,1338 v1(1351,1286) 1373,1308 1594,1308 1704,1418 1955,1418 1998.08,1461.08 U1.27
  Bottom Layer w10: v1(1351,1286) 1351,1258 1372.32,1236.68 U2.5
NetC5_2: C5.2 R2.1 R3.1 U2.8 | length 308
  Bottom Layer w10: U2.8 1433.26,1343.74 1433,1344 1456.5,1367.5 1456.5,1377 R2.1 1474,1394.5 C5.2 1547.91,1527.41 R3.1
NetC16_2: C16.2 J3.1 R14.2 R15.1 | length 1067
  Top Layer w25: R14.2 1132.99,2381.82 1132.99,2397.99 1224,2489 1449.5,2489 1459,2479.5 1459,2450 C16.2 ; C16.2@1459,2480 1467,2488 1688.57,2488 J3.1 1819.57,2149.43 R15.1
NetD1_C: D1.C R14.1 | length 123
  Top Layer w10: D1.C 1140,2212.24 1140,2294.18 R14.1
NetJ3_2: J3.2 U8.3 | length 265.1
  Top Layer w10: J3.2 2016.43,2104 2022.43,2098 U8.3
NetLED1_2: LED1.2 R6.2 | length 65
  Top Layer w10: R6.2 LED1.2
NetLED2_2: LED2.2 R9.2 | length 67
  Top Layer w10: R9.2 LED2.2
NetLED3_2: LED3.2 R18.2 | length 71.1
  Top Layer w10: LED3.2 R18.2
NetQ1_1: Q1.1 R7.1 | length 155
  Top Layer w10: R7.1 1839.12,1384.7 1865.8,1384.7 1929.38,1321.12 1929.38,1290.22 Q1.1
NetQ2_1: Q2.1 R8.1 | length 152.3
  Top Layer w10: Q2.1 1695.62,1212.28 1695.62,1179.88 1757.5,1118 R8.1
NetR4_1: R4.1 U2.9 | length 117.1
  Bottom Layer w10: U2.9 1452.95,1329.54 1471.54,1348.14 1492.87,1348.14 1505.78,1361.05 1505.78,1361.44 1527.33,1383 R4.1
NetR10_2: R10.2 U1.18 U6.13 | length 425.3
  Top Layer w10: R10.2 2073.5,1693.51 2080.91,1686.1 2083.9,1686.1 v1(2085,1685) ; R10.2@2075,1726 2115,1766 U6.13 ; U1.18 v1(2280,1614)
  Bottom Layer w10: v1(2085,1685) 2209,1685 v1(2280,1614)
NetR11_2: R11.2 U1.19 U6.14 | length 311.5
  Top Layer w10: U6.14 2134.68,1747.82 2140.5,1742 2140.5,1740.5 2155,1726 R11.2 2156.5,1675.06 2171,1660.56 v1(2171,1659) ; U1.19 v1(2248.5,1606.5)
  Bottom Layer w10: v1(2171,1659) 2196.01,1659 v1(2248.5,1606.5)
NetR12_2: R12.2 U1.13 U7.2 | length 403.8
  Top Layer w10: U7.2 2321.72,1819.32 2310,1807.59 2310,1704 2343,1671 2377,1671 2437.48,1610.52 U1.13
NetR13_2: R13.2 U1.12 U7.4 | length 261.6
  Top Layer w10: U7.4 2418.07,1730.66 R13.2 2416.57,1680.43 2468.98,1628.02 U1.12
NetR16_1: R16.1 U8.1 | length 83.9
  Top Layer w10: U8.1 2203.17,2060.5 R16.1
NetR16_2: R16.2 R17.1 S1.3 | length 354.9
  Top Layer w10: R16.2 2357.33,2060 R17.1 2491.59,2060.67 S1.3
NetR18_1: R18.1 S1.6 | length 204.4
  Top Layer w10: R18.1 S1.6
NetR19_2: R19.2 U9.7 | length 87.2
  Top Layer w10: R19.2 2610.67,1723 U9.7
NetR20_2: R20.2 U9.3 | length 87.2
  Top Layer w10: U9.3 3067.33,1773 R20.2
NetS1_2: S1.2 U1.6 | length 954.4
  Top Layer w10: U1.6 2547.59,1366.59 2568,1387 v1(2568,1407) ; v1(2568,1701) 2568,2024 2698.98,2154.98 S1.2
  Bottom Layer w10: v1(2568,1407) v1(2568,1701)
NetU1_5: U1.5 U9.2 | length 742.4
  Top Layer w10: U1.5 2512.74,1335.55 2605.55,1335.55 v1(2606,1336) ; v1(2912,1700) 2935,1723 U9.2
  Bottom Layer w10: v1(2606,1336) 2607,1335 2736,1335 2831,1430 2831,1619 v1(2912,1700)
NetU1_16: U1.16 U9.1 | length 759.5
  Top Layer w10: U1.16 2342.99,1594.99 v1(2360,1612) ; v1(2493,1612) 2538,1612 2601,1549 2787,1549 2911,1673 U9.1
  Bottom Layer w10: v1(2360,1612) v1(2493,1612)
NetU1_20: U1.20 U9.6 | length 595.9
  Top Layer w10: U1.20 2217.01,1609.01 2244,1636 v1(2352.22,1636) ; v1(2605,1773) U9.6
  Bottom Layer w10: v1(2352.22,1636) 2468,1636 v1(2605,1773)
NetU1_21: U1.21 U9.5 | length 649.8
  Top Layer w10: U1.21 2185.51,1610.51 2232,1657 v1(2315.1,1657) ; v1(2621,1824) 2621.5,1823.5 2695,1823.5 U9.5
  Bottom Layer w10: v1(2315.1,1657) 2453,1657 2620,1824 v1(2621,1824)
U0RXD: U1.30 U2.26 | length 878.2
  Top Layer w10: v1(1472,1081) 1473.1,1079.9 1473.1,1069.9 1501,1042 1859,1042 1985,1168 v1(1985,1241) ; v1(1985,1305) 1984.57,1305.43 1984.57,1343.3 2007.86,1366.59 U1.30
  Bottom Layer w10: v1(1472,1081) 1472.63,1081.63 U2.26 ; v1(1985,1241) v1(1985,1305)
U0TXD: U1.31 U2.25 | length 767
  Top Layer w10: v1(1493,1081) 1494.56,1081 1514.56,1061 v1(1645,1061) ; v1(1903,1117) 1966,1180 1966,1261.38 2039.72,1335.09 U1.31
  Bottom Layer w10: U2.25 1492.32,1081.68 v1(1493,1081) ; v1(1645,1061) 1847,1061 v1(1903,1117)
Vbus: CR1.2 J2.1 R2.2 | length 356.6
  Top Layer w10: J2.1 1240.18,1397.18 1249,1406 1249,1459 1261,1471 1297.63,1471 CR1.2 1297.47,1473.11 1285,1460.64 v1(1285,1411)
  Bottom Layer w10: v1(1285,1411) 1305,1391 R2.2
pads on no net: J2.4 S1.1 S1.4 SW1.2 SW1.3 SW2.2 SW2.3 U1.4 U1.7 U1.9 U1.10 U1.15 U1.17 U1.24 U1.25 U1.28 U1.29 U1.32 U1.33 U1.34 U1.35 U2.1 U2.2 U2.10 U2.11 U2.12 U2.13 U2.14 U2.15 U2.16 U2.17 U2.18 U2.19 U2.20 U2.21 U2.22 U2.23 U2.27 U6.4 U6.9 U6.10 U6.11 U6.12 U7.7

## Polygon pours and split planes (outlines as drawn)
3V3 on Top Layer "3V3_L01_P000" (solid, pour order 0): 1010,1010 1010,2540 3140,2540 3140,1010
GND on Bottom Layer "GND_L02_P001" (solid, pour order 1): 1010,1010 1010,2540 3140,2540 3140,1010

## Other copper
Top Layer:
  region: 1585.93,1216.88 1585.93,1216.82 1585.87,1216.82 1585.87,1216.88
  region: 1585.62,1217.25 1585.62,1217.19 1585.56,1217.19 1585.56,1217.25
  region: 1564.17,1214.08 1564.24,1214.08 1564.24,1214.02 1564.17,1214.02
  region: 1566.6,1214.52 1566.66,1214.52 1566.66,1214.45 1566.6,1214.45
  region: 1565.91,1215.82 1565.91,1215.76 1565.85,1215.76 1565.85,1215.82
  region: 1556.22,1263.01 1556.28,1263.01 1556.28,1262.95 1556.22,1262.95 1556.22,1262.89 1556.15,1262.89 1556.15,1262.95 1556.22,1262.95
  region: 1572.63,1240.26 1572.63,1240.19 1572.57,1240.19 1572.57,1240.26
  region: 1582.33,1193.19 1582.39,1193.19 1582.39,1193.13 1582.33,1193.13
  region: 1573.31,1240.63 1573.31,1240.75 1573.38,1240.75 1573.38,1240.63
  region: 1587.12,1211.6 1587.05,1211.6 1587.05,1211.66 1587.12,1211.66
  region: 1582.39,1193.19 1582.39,1193.25 1582.45,1193.25 1582.45,1193.19
  region: 1583.01,1257.98 1583.07,1257.98 1583.07,1257.91 1583.01,1257.91
  region: 1572.5,1240.01 1572.44,1240.01 1572.44,1240.13 1572.5,1240.13 1572.5,1240.19 1572.57,1240.19 1572.57,1240.07 1572.5,1240.07
  region: 1586.99,1211.47 1586.99,1211.6 1587.05,1211.6 1587.05,1211.41 1586.99,1211.41 1586.99,1211.28 1586.93,1211.28 1586.93,1211.47
  region: 1552.8,1267.24 1552.86,1267.24 1552.86,1267.18 1552.8,1267.18 1552.8,1267.11 1552.73,1267.11 1552.73,1267.18 1552.8,1267.18
  region: 1548.57,1270.29 1548.63,1270.29 1548.63,1270.22 1548.51,1270.22 1548.51,1270.29
  region: 2733.91,1394.86 2733.91,1395.02 2734.08,1395.02 2734.08,1394.86
  region: 2734.24,1395.36 2734.41,1395.36 2734.41,1395.19 2734.24,1395.19 2734.24,1395.02 2734.08,1395.02 2734.08,1395.19 2734.24,1395.19
  region: 2736.91,1409.01 2736.91,1408.84 2736.74,1408.84 2736.74,1409.01 2736.57,1409.01 2736.57,1409.17 2736.74,1409.17 2736.74,1409.01
  region: 2734.91,1395.69 2734.91,1395.52 2734.74,1395.52 2734.74,1395.36 2734.41,1395.36 2734.41,1395.52 2734.58,1395.52 2734.58,1395.69 2734.74,1395.69
  region: 2240.27,2287.47 2239.64,2287.47 2239.64,2288.1 2240.27,2288.1
  region: 2230.23,2303.16 2229.61,2303.16 2229.61,2303.79 2230.23,2303.79

## Silkscreen, mask and mechanical layers (free items; w line width, h text height)
Top Overlay:
  drawing of 202 lines, arcs and shapes, not listed
  text "SLAYER V1.0 / Flight Comp" at 2584,1870 h50
Top Solder:
  region: 2249.68,2328.89 2249.68,2329.52 2250.31,2329.52 2250.31,2328.89